# EAGLE board acdr_3.1 (EAGLE 7.7.0)
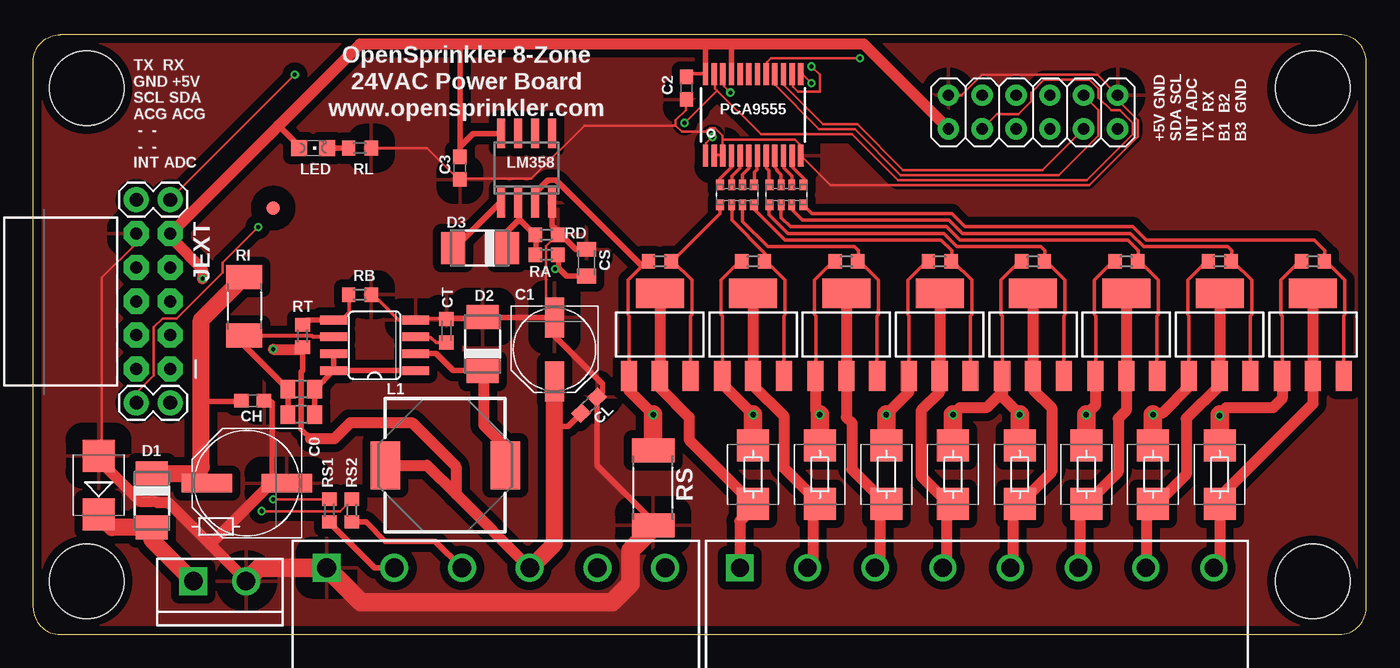
[diagram p0: board, top side]
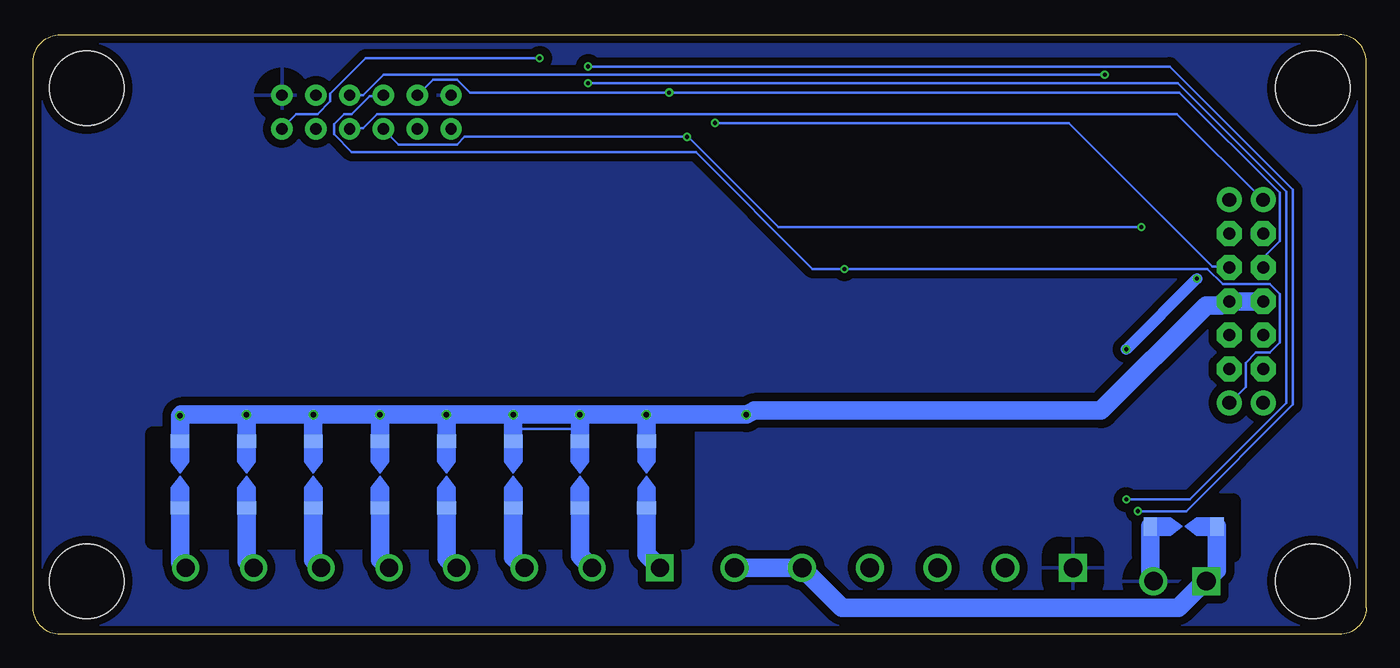
[diagram p1: board, bottom side, seen from below]

Size 100 x 45 mm. Coordinates in mm from the lower left corner, seen from the top.
Outline: 2,0 98,0 arc90 100,2 100,43 arc90 98,45 2,45 arc90 0,43 0,2 arc90 2,0
Copper layers (1*16): Top 0.035mm / dielectric 1.5mm / Bottom 0.035mm
Design rules "Fusion_eagle_rule_v1.1 *": minimum track width 6mil, minimum drill 12mil, track to track 6mil, track to pad 6mil, pad to pad 6mil, via to via 6mil, smd to smd 0mil, copper to edge 10mil, drill to drill 10mil, minimum pad ring 10mil, minimum via ring 6mil, stop-mask expansion 2mil, vias tented up to drill 100mil, thermal gap 50mil
Net classes: 0 default: width 0.203 mm, clearance 0.178 mm; 1 power: width 0.203 mm, clearance 0.178 mm; 2 relaypower: width 0.203 mm, clearance 0.178 mm; 3 signal: width 0.203 mm, clearance 0.178 mm; 4 adc: width 0.406 mm, clearance 0.178 mm
Holes 5.6 mm at 4,4 96,4 4,41 96,41
bRestrict: area 10,6 to 17,10; area 51,7 to 91,15

## Footprints (pad centres in the part's own frame; a part is rotated, then mirrored left to right if it is on the bottom)
FIDUCIAL_1MM = smd 1 x 1: 1 0,0
PANASONIC_E = smd 3.8 x 1.4: + 3,0; - -3,0
PANASONIC_D = smd 3 x 1.4: + 2.4,0; - -2.4,0
C0603 = smd 1.1 x 1: 1 -0.85,0; 2 0.85,0
C0805K = smd 1.1 x 1.4: 1 -1,0; 2 1,0
C0603K = smd 1.05 x 1.08: 1 -0.875,0; 2 0.875,0
DO-214AC = smd 1.8 x 2.4: A 2.025,0; C -2.025,0
SCREWTERMINAL-5MM-6 = drill 1.4 pad 2.032 square: 1 0,0 | drill 1.4 pad 2.032: 2 5.08,0; 3 10.16,0; 4 15.24,0; 5 20.32,0; 6 25.4,0
2X06 = drill 0.85 pad 1.6: 1 -6.35,-1.27; 2 -6.35,1.27; 3 -3.81,-1.27; 4 -3.81,1.27; 5 -1.27,-1.27; 6 -1.27,1.27; 7 1.27,-1.27; 8 1.27,1.27; 9 3.81,-1.27; 10 3.81,1.27; 11 6.35,-1.27; 12 6.35,1.27
1X02 = drill 1.016 pad 1.88: 1 0,0; 2 2.54,0
2X5-RAF = drill 0.9 pad 1.88 octagon: 1 -1.27,5.08; 2 1.27,5.08; 3 -1.27,2.54; 4 1.27,2.54; 5 -1.27,0; 6 1.27,0; 7 -1.27,-2.54; 8 1.27,-2.54; 9 -1.27,-5.08; 10 1.27,-5.08
SCREWTERMINAL-4MM-2-X = drill 1.4 pad 2.032 square: 1 0,0 | drill 1.4 pad 2.032: 2 3.96,0
SRU1038 = smd 2.2 x 3.6: 1 -4.5,0; 2 4.5,0
CHIPLED_0805 = smd 1.2 x 1.2: A 0,-1.05; C 0,1.05
SO08 = smd 0.6 x 2.2: 1 -1.905,-2.6; 2 -0.635,-2.6; 3 0.635,-2.6; 4 1.905,-2.6; 5 1.905,2.6; 6 0.635,2.6; 7 -0.635,2.6; 8 -1.905,2.6
SO08' = smd 0.66 x 2.032: 1 -1.905,-3.073; 2 -0.635,-3.073; 3 0.635,-3.073; 4 1.905,-3.073; 5 1.905,3.073; 6 0.635,3.073; 7 -0.635,3.073; 8 -1.905,3.073
TSSOP24 = smd 0.4 x 1.65: 1 -3.575,-3.05; 2 -2.925,-3.05; 3 -2.275,-3.05; 4 -1.625,-3.05; 5 -0.975,-3.05; 6 -0.325,-3.05; 7 0.325,-3.05; 8 0.975,-3.05; 9 1.625,-3.05; 10 2.275,-3.05; 11 2.925,-3.05; 12 3.575,-3.05; 13 3.575,3.05; 14 2.925,3.05; 15 2.275,3.05; 16 1.625,3.05; 17 0.975,3.05; 18 0.325,3.05; 19 -0.325,3.05; 20 -0.975,3.05; 21 -1.625,3.05; 22 -2.275,3.05; 23 -2.925,3.05; 24 -3.575,3.05
R0603 = smd 1 x 1.1: 1 -0.85,0; 2 0.85,0
R2010 = smd 1.8 x 2.7: 1 -2.2,0; 2 2.2,0
EXB38V = smd 0.6 x 0.8: 1 -1.275,-0.75; 4 1.275,-0.75; 5 1.275,0.75; 8 -1.275,0.75 | smd 0.5 x 0.8: 2 -0.4,-0.75; 3 0.4,-0.75; 6 0.4,0.75; 7 -0.4,0.75
R2512 = smd 1.8 x 3.2: 1 -2.8,0; 2 2.8,0
R0805 = smd 1.1 x 1.4: 1 -1,0; 2 1,0
SCREWTERMINAL-5MM-8 = drill 1.35 pad 2.032 square: 1 0,0 | drill 1.35 pad 2.032: 2 5.08,0; 3 10.16,0; 4 15.24,0; 5 20.32,0; 6 25.4,0; 7 30.48,0; 8 35.56,0
PCB-SGAP = smd 1 x 1.4 bottom: 1 -2.5,0; 2 2.5,0
SOT223 = smd 1.219 x 2.235: 1 -2.311,-3.099; 2 0,-3.099; 3 2.311,-3.099 | smd 3.6 x 2.2: 4 0,3.099
SMB = smd 2.4 x 2.4: A 2.2,0; C -2.2,0

## Placement (x,y rotation side)
1F  FIDUCIAL  [FIDUCIAL_1MM]  18,32 0 top
C0  100uF/50V  [PANASONIC_E]  16.02,11.35 180 top
C1  100uF/35V  [PANASONIC_D]  39.1,21.4 270 top
C2  0.1u  [C0603]  49,41 270 top
C3  0.1u  [C0603]  32,35 270 top
CH  0.1u  [C0603]  16.46,17.53 0 top
CL  0.1u  [C0603]  41.7,17.2 45 top
CS  10u  [C0805K]  41.5,27.9 90 top
CT  150pF  [C0603K]  31,22.8 90 top
D1  M7  [DO-214AC]  8.89,10.04 270 top
D2  SS14  [DO-214AC]  33.7,21.8 90 top
D3  M7  [DO-214AC]  33.5,29 180 top
JCOM  [SCREWTERMINAL-5MM-6]  22,5 0 top
JCON  [2X06]  75,39.2 0 top
JE1  [1X02]  7.73,32.62 0 top
JE2  [1X02]  7.73,17.38 0 top
JEXT  M05X2RAF  [2X5-RAF]  9,25 180 top
JPWR  [SCREWTERMINAL-4MM-2-X]  12,4 0 top
L1  220uH  [SRU1038]  30.9,12.7 180 top
LED  [CHIPLED_0805]  21,36.5 270 top
LM358  [SO08]  37,35 0 top
MC3063  MC34063  [SO08']  25.6,21.7 90 top
PCA9555  PCA9555  [TSSOP24]  54,39 0 top
RA  100  [R0603]  38.5,28.5 180 top
RB  1.6K  [R0603]  24.5,25.5 0 top
RB1  10K  [R0603]  47,28 0 top
RB2  10K  [R0603]  54,28 0 top
RB3  10K  [R0603]  61,28 0 top
RB4  10K  [R0603]  68,28 0 top
RB5  10K  [R0603]  75,28 0 top
RB6  10K  [R0603]  82,28 0 top
RB7  10K  [R0603]  89,28 0 top
RB8  10K  [R0603]  96,28 0 top
RD  100K  [R0603]  38.5,30 180 top
RI  3.3  [R2010]  15.83,24.63 270 top
RL  1K  [R0603]  24.5,36.5 0 top
RN1  390  [EXB38V]  52.8,33 0 top
RN2  390  [EXB38V]  56.5,33 0 top
RS  0.2  [R2512]  46.5,11 90 top
RS1  4K7  [R0603]  22.2,9.3 270 top
RS2  4K7  [R0603]  23.9,9.3 270 top
RSC  1  [R0805]  20.1,16.5 180 top
RSC1  1  [R0805]  20.1,18.4 180 top
RT  4.7K  [R0603]  20.2,22.4 90 top
S02  [SCREWTERMINAL-5MM-8]  53,5 0 top
SP0  PCB-SGAP  [PCB-SGAP]  13.7,8.1 0 top
SP1  PCB-SGAP  [PCB-SGAP]  54,12 270 top
SP2  PCB-SGAP  [PCB-SGAP]  59,12 270 top
SP3  PCB-SGAP  [PCB-SGAP]  64,12 270 top
SP4  PCB-SGAP  [PCB-SGAP]  69,12 270 top
SP5  PCB-SGAP  [PCB-SGAP]  74,12 270 top
SP6  PCB-SGAP  [PCB-SGAP]  79,12 270 top
SP7  PCB-SGAP  [PCB-SGAP]  84,12 270 top
SP8  PCB-SGAP  [PCB-SGAP]  89,12 270 top
T1  BT1308W  [SOT223]  47,22.5 0 top
T2  BT1308W  [SOT223]  54,22.5 0 top
T3  BT1308W  [SOT223]  61,22.5 0 top
T4  BT1308W  [SOT223]  68,22.5 0 top
T5  BT1308W  [SOT223]  75,22.5 0 top
T6  BT1308W  [SOT223]  82,22.5 0 top
T7  BT1308W  [SOT223]  89,22.5 0 top
T8  BT1308W  [SOT223]  96,22.5 0 top
TVS0  SMBJ45CA  [SMB]  4.9,11.2 90 top
TVS1  SMBJ45CA  [SMB]  54,12 270 top
TVS2  SMBJ45CA  [SMB]  59,12 270 top
TVS3  SMBJ45CA  [SMB]  64,12 270 top
TVS4  SMBJ45CA  [SMB]  69,12 270 top
TVS5  SMBJ45CA  [SMB]  74,12 270 top
TVS6  SMBJ45CA  [SMB]  79,12 270 top
TVS7  SMBJ45CA  [SMB]  84,12 270 top
TVS8  SMBJ45CA  [SMB]  89,12 270 top

## Library data of the parts
1F RB RI RSC RSC1 RT = adafruitGood
C0 C1 = resistor
C2 C3 CH CL CS CT LED MC3063 = adafruit
D1-D3 TVS0 = diode
JCOM JPWR S02 T1-T8 = SparkFun
JCON = pinhead
JE1 JE2 JEXT L1 PCA9555 TVS1-TVS8 = SparkFunNew
LM358 = linear
RA RD RL RS RS1 RS2 = adafruit2013
RB1-RB8 = rcl
RN1 RN2 = resistor-dil; OC_FARNELL: unknown; OC_NEWARK: unknown
SP0 SP1-SP8 = varistor

## Nets
ACRET: JEXT.5 JEXT.6 LM358.3 RB1.1 RB2.1 RB3.1 RB4.1 RB5.1 RB6.1 RB7.1 RB8.1 RS.2 SP1.1 SP2.1 SP3.1 SP4.1 SP5.1 SP6.1 SP7.1 SP8.1 T1.1 T2.1 T3.1 T4.1 T5.1 T6.1 T7.1 T8.1 TVS1.C TVS2.C TVS3.C TVS4.C TVS5.C TVS6.C TVS7.C TVS8.C
B1: JCON.9 PCA9555.15
B2: JCON.10 PCA9555.16
B3: JCON.11 PCA9555.17
COM [power]: D1.A JCOM.5 JCOM.6 JPWR.1 SP0.1 TVS0.C
DADC [signal]: CS.1 JCON.6 JE2.2 RA.1
DGND [power]: C0.- C1.- C2.2 C3.2 CH.2 CL.2 CS.2 CT.2 D2.A JCOM.1 JCON.2 JCON.12 JEXT.10 JPWR.2 LM358.4 MC3063.4 PCA9555.2 PCA9555.3 PCA9555.12 RB.2 RD.1 RL.2 RS.1 SP0.2 TVS0.A
DSCL [signal]: JCON.4 JEXT.8 PCA9555.22
DSDA [signal]: JCON.3 JEXT.7 PCA9555.23
DVIN [power]: C1.+ C2.1 C3.1 CL.1 JCOM.4 JCON.1 JEXT.9 L1.2 LED.A LM358.8 PCA9555.21 PCA9555.24 RT.1
INT [signal]: JCON.5 JE2.1 PCA9555.1
N$1 [power]: MC3063.1 MC3063.7 MC3063.8 RSC1.1 RSC.1
N$2: JCOM.2 RS1.2
N$3: JCOM.3 RS2.2
N$7: D3.C LM358.2 RA.2 RD.2
N$8: RB1.2 RN1.1 T1.3
N$9: RB2.2 RN1.2 T2.3
N$15: RB3.2 RN1.3 T3.3
N$16: RB4.2 RN1.4 T4.3
N$17 [power]: D2.C L1.1 MC3063.2
N$18: RB5.2 RN2.1 T5.3
N$19: RB6.2 RN2.2 T6.3
N$21: RB7.2 RN2.3 T7.3
N$22: RB8.2 RN2.4 T8.3
N$24: CT.1 MC3063.3
N$26: MC3063.5 RB.1 RT.2
N$27 [power]: MC3063.6 RI.2 RSC1.2 RSC.2
N$28: LED.C RL.1
N$43: D3.A LM358.1
N$50 [power]: S02.1 SP1.2 T1.2 T1.4 TVS1.A
N$51 [power]: S02.2 SP2.2 T2.2 T2.4 TVS2.A
N$52 [power]: S02.3 SP3.2 T3.2 T3.4 TVS3.A
N$53 [power]: S02.4 SP4.2 T4.2 T4.4 TVS4.A
N$54 [power]: S02.5 SP5.2 T5.2 T5.4 TVS5.A
N$55 [power]: S02.6 SP6.2 T6.2 T6.4 TVS6.A
N$56 [power]: S02.7 SP7.2 T7.2 T7.4 TVS7.A
N$57 [power]: S02.8 SP8.2 T8.2 T8.4 TVS8.A
P0: PCA9555.4 RN1.8
P1: PCA9555.5 RN1.7
P2: PCA9555.6 RN1.6
P3: PCA9555.7 RN1.5
P4: PCA9555.8 RN2.8
P5: PCA9555.9 RN2.7
P6: PCA9555.10 RN2.6
P7: PCA9555.11 RN2.5
RECAC [power]: C0.+ CH.1 D1.C RI.1
RFRX: JCON.8 JE1.2
RFTX: JCON.7 JE1.1
S1 [signal]: PCA9555.13 RS1.1
S2 [signal]: PCA9555.14 RS2.1

## Tracks (layer width: path | path; a pad name or v marks a point on that pad's centre or on a via)
ACRET  (via drill 0.41)
  Top 0.254: T1.1 44.7,19.5 44.7,23.9 44.6,24 44.6,26.6 45.65,27.65 46.1,28.1 46.2,28.1 46.2,28 RB1.1 | T2.1 51.7,19.5 51.7,23.9 51.6,24 51.6,26.6 53.1,28.1 53.2,28.1 53.2,28 RB2.1 | T3.1 58.7,19.5 58.7,23.9 58.6,24 58.6,26.6 60.1,28.1 60.2,28.1 60.2,28 RB3.1 | T4.1 65.7,19.5 65.7,23.9 65.6,24 65.6,26.6 67.1,28.1 67.2,28.1 67.2,28 RB4.1 | T5.1 72.7,19.5 72.7,23.9 72.6,24 72.6,26.6 74.1,28.1 74.2,28.1 74.2,28 RB5.1 | T6.1 79.7,19.5 79.7,23.9 79.6,24 79.6,26.6 81.1,28.1 81.2,28.1 81.2,28 RB6.1 | T7.1 86.7,19.5 86.7,23.9 86.6,24 86.6,26.6 88.1,28.1 88.2,28.1 88.2,28 RB7.1 | T8.1 93.7,19.5 93.7,23.9 93.6,24 93.6,26.6 95.1,28.1 95.2,28.1 95.2,28 RB8.1
  Top 0.406: 45.65,27.65 39.2,34.1 38.6,34.1 37.6,33.1 37.6,32.4 LM358.3
  Top 0.813: T2.1 51.69,18.81 v54,16.5 | T3.1 58.69,16.81 v59,16.5 | T4.1 65.69,18.19 v64,16.5 | v69,16.5 69.5,17 71.5,17 72.69,18.19 T5.1 72.69,17.81 v74,16.5 | T6.1 79.69,17.19 v79,16.5 | T8.1 93.69,17.69 93,17 89.5,17 89,16.5 | T1.1 44.69,18.31 v46.5,16.5 | T7.1 86.69,18.59 84.7,16.6 84.1,16.6 v84,16.5
  Top 1.4: TVS1.C v54,16.5 | TVS2.C v59,16.5 | TVS4.C v69,16.5 | TVS5.C v74,16.5 | TVS6.C v79,16.5 | TVS7.C v84,16.5 | TVS8.C v89,16.4 89,16.5 | TVS3.C v64,16.5 | v46.5,16.5 RS.2
  Bottom 0.203: 59,15.81 59.05,15.81 v59,16.5 | 64,15.43 59,15.43
  Bottom 1.4: v54,16.5 v59,16.5 v64,16.5 v69,16.5 | v69,16.5 v74,16.5 | v74,16.5 78.8,16.5 | 78.8,16.5 v79,16.5 v84,16.5 | v84,16.5 88.9,16.5 v89,16.4 SP8.1 | v54,16.5 SP1.1 | SP2.1 59,15.43 59,15.81 59,16.4 | SP3.1 64,15.43 64,16.4 | SP4.1 v69,16.5 | SP5.1 v74,16.5 | SP6.1 79,16.3 78.8,16.5 | SP7.1 v84,16.5 | v54,16.5 v46.5,16.5 45.9,16.8 19.9,16.8 12,24.7 10.9,24.7 JEXT.5 JEXT.6
B1
  Top 0.203: PCA9555.15 56.29,42.01 56.29,41.24 59.24,38.29 61.82,38.29 65.25,34.86 75.72,34.86 78.77,37.91 JCON.9
B2
  Top 0.203: PCA9555.16 55.63,42.01 55.63,41.24 58.96,37.91 61.63,37.91 65.06,34.48 76.96,34.48 79.92,37.43 79.92,39.34 78.87,40.39 JCON.10
B3  (via drill 0.3)
  Top 0.203: v62.01,43.24 55.34,43.24 55.05,42.96 55.05,42.1 PCA9555.17
  Bottom 0.203: v62.01,43.24 75.06,43.24 77.72,40.58 77.72,40.01 78.68,39.05 80.3,39.05 81.34,38.01 JCON.11
COM
  Top 1.27: JPWR.1 8.89,7.11 D1.A 5.88,8.02 TVS0.C
  Bottom 1.4: JCOM.6 JCOM.5 39.32,2 14.1,2 12.1,4 JPWR.1 11.2,4.8 SP0.1
DADC  (via drill 0.3)
  Top 0.203: v39.15,27.43 39.24,27.43 39.4,27.5
  Top 0.406: CS.1 40,26.9 39.4,27.5 39.4,28.5 RA.1
  Bottom 0.203: JE2.2 10.19,17.43 9.05,18.57 9.05,20.38 8.29,21.14 7.24,21.14 6.48,21.91 6.48,25.53 7.24,26.29 10.76,26.29 11.91,27.43 v39.15,27.43 41.53,27.43 50.29,36.2 76.11,36.2 77.44,37.53 77.44,38.29 76.68,39.05 76.11,39.05 74.77,40.39 73.82,40.39 JCON.6
DGND
  Top 0.203: JCON.2 68.67,40.48 69.63,40.48 71.15,42.01 79.82,42.01 81.34,40.48 JCON.12 81.44,40.39 81.44,40.01 82.87,38.58 82.87,37.34 79.25,33.72 59.82,33.72 57.63,35.91 PCA9555.12 57.53,36.01 57.53,36.77 57.15,37.15 51.72,37.15 | 48.2,38.2 48.2,38.58 48.96,39.34 48.96,40.1 C2.2 | 48.2,38.2 48.67,37.72 50.48,37.72 50.77,38.01 51.15,38.01 51.72,37.43 51.72,37.15 | 51.72,37.15 51.72,36.01 PCA9555.3 51.63,36.01 51.15,36.01 PCA9555.2 | RL.2 25.43,36.48 29.53,36.48 31.81,34.2 C3.2 32.19,34.2 37.34,34.2 41.34,38.2 48.2,38.2 | RD.1 39.24,29.91 38.48,29.15 38.48,24 C1.- | JEXT.10 7.71,30 7.71,29.34 5.14,26.77 5.14,13.72 TVS0.A
  Top 0.254: CT.2 31,23.7 29.6,23.7 29.5,23.6 28.7,23.6 MC3063.4 28.6,23.6 27.4,23.6 25.4,25.6 25.3,25.5 RB.2
  Top 0.406: C0.- 17.9,11.8 17.9,17.4 17.8,17.5 17.4,17.5 CH.2 | CT.2 31.1,23.7 32.4,23.7 32.5,23.8 33.7,23.8 D2.A 33.9,23.8 C1.- 39.1,22.4 42.7,18.8 42.7,18.2 CL.2 42.3,17.6 42.3,12.7 46.2,8.8 RS.1 | CS.2 40.7,28.9 39.8,29.8 39.6,30 | 39.6,30 RD.1 | LM358.4 38.91,30.7 39.6,30
  Top 0.813: TVS0.A 4.8,13.4 4.7,13.3 8,10 8.9,10 9.3,9.9 10.1,9.9 13.25,6.75 | 13.25,6.75 15.5,4.5 JPWR.2 | 13.25,6.75 17.9,11.4 19,11.4 C0.-
  Top 1.4: RS.1 46.5,8 44.8,6.3 44.8,3.8 43.4,2.4 24.6,2.4 JCOM.1 16.96,5 JPWR.2
  Bottom 1.4: SP0.2 16.2,4.24 JPWR.2
  pour Top (isolate 0.61): 0,45 100,45 100,0 0,0
  pour Bottom (isolate 0.61): 0,45 100,45 100,0 0,0
DSCL  (via drill 0.3)
  Top 0.203: v52.29,40.67 51.82,41.15 51.82,42.01 PCA9555.22
  Bottom 0.203: JCON.4 71.15,40.48 70.01,41.62 68.2,41.62 67.25,40.67 v52.29,40.67 14,40.67 6.48,33.15 6.48,29.53 7.71,28.29 7.71,27.62 JEXT.8
DSDA  (via drill 0.3)
  Top 0.203: 51.29,40.81 54.58,37.53 61.44,37.53 64.86,34.1 79.06,34.1 82.49,37.53 82.49,38.39 81.53,39.34 80.87,39.34 79.92,40.29 79.92,40.96 79.25,41.62 75.82,41.62 74.87,40.67 74.87,40.01 73.91,39.05 72.3,39.05 71.25,38.01 JCON.3 | 51.29,40.81 51.15,40.96 51.15,42.01 PCA9555.23 | 51.29,40.81 v48.86,38.39
  Bottom 0.203: v48.86,38.39 22.29,38.39 11.53,27.62 10.29,27.62 JEXT.7
DVIN  (via drill 0.3)
  Top 0.254: C2.1 49,42 49.1,42.1 50.4,42.1 PCA9555.24
  Top 0.406: CL.1 40.1,15.6 39.1,15.6 | LM358.8 33,37.6 32,36.6 | C3.1 32,36.6 | LED.A 19.95,36.65 18.4,38.2 | 32,36.6 32,44.3 | PCA9555.21 52.38,44.02 52.1,44.3 | PCA9555.24 50.42,44.23 50.5,44.3 | RT.1 20.2,19.8 20.1,19.7 20.1,15.4 20.8,14.7
  Top 0.813: JCON.1 68.6,38 62.3,44.3 52.1,44.3 50.5,44.3 32,44.3 24.5,44.3 18.4,38.2 10.3,30.1 JEXT.9 10.4,29.7 12.7,27.4 v12.7,26.7 | L1.2 29.54,12.7 31.7,10.54 | 20.8,14.7 22.6,14.7 23.8,15.9 28.4,15.9 31.7,12.6 31.7,10.54 | 31.7,10.54 JCOM.4 | v18,21.4 20.05,21.4 RT.1
  Top 1.27: C1.+ 39.1,15.6 39.1,6.8 37.3,5 JCOM.4
  Bottom 0.813: v12.7,26.7 v18,21.4
INT  (via drill 0.3)
  Top 0.203: v50.96,37.34 50.48,36.86 50.48,36.01 PCA9555.1 | v16.86,30.57 14.19,27.91 14.19,27.15 10.76,23.72 9.72,23.72 9.05,23.05 9.05,19.43 7.81,18.19 7.81,17.43 JE2.1
  Bottom 0.203: JCON.5 73.72,37.91 72.58,36.77 68.2,36.77 67.63,37.34 v50.96,37.34 50.86,37.34 44.1,30.57 v16.86,30.57
N$1
  Top 0.406: RSC.1 RSC1.1 21.13,18.4 MC3063.8 | MC3063.7 MC3063.8 | MC3063.8 MC3063.1
N$2
  Top 0.406: JCOM.2 25.6,5 22.2,8.4 RS1.2
N$3
  Top 0.406: RS2.2 24.95,8.45 26.4,7 30.16,7 JCOM.3
N$7
  Top 0.406: 36.4,31.1 35.5,30.2 35.5,29 D3.C | 36.4,31.1 36.4,32.4 LM358.2 | 36.4,31.1 36.5,31.1 37.6,30 RD.2 37.7,29.8 37.7,28.5 RA.2
N$8
  Top 0.254: RN1.1 51.5,32.2 51.5,31.6 47.9,28 RB1.2 48,28 49.4,26.6 49.4,24 49.3,23.9 49.3,19.5 T1.3
N$9
  Top 0.254: RN1.2 52.4,31.1 54.9,28.6 54.9,28 RB2.2 55,28 56.4,26.6 56.4,24 56.3,23.9 56.3,19.5 T2.3
N$15
  Top 0.254: RN1.3 53.2,31 55.1,29.1 61.6,29.1 61.9,28.8 61.9,28 RB3.2 62,28 63.4,26.6 63.4,24 63.3,23.9 63.3,19.5 T3.3
N$16
  Top 0.254: RN1.4 54.1,32.2 54.1,31.9 56.4,29.6 68.1,29.6 68.9,28.8 68.9,28 RB4.2 69,28 70.4,26.6 70.4,24 70.3,23.9 70.3,19.5 T4.3
N$17
  Top 0.406: MC3063.2 28.7,21.1 30.2,21.1 31.5,19.8 33.7,19.8 D2.C
  Top 0.813: L1.1 35.4,14.1 33.8,15.7 33.8,19.6 D2.C
N$18
  Top 0.254: RN2.1 55.2,32.2 55.2,31.5 56.6,30.1 68.3,30.1 69.3,29.1 75.6,29.1 75.9,28.8 75.9,28 RB5.2 76,28 77.4,26.6 77.4,24 77.3,23.9 77.3,19.5 T5.3
N$19
  Top 0.254: RN2.2 56.1,31.3 56.8,30.6 68.5,30.6 69.5,29.6 82.1,29.6 82.9,28.8 82.9,28 RB6.2 83,28 84.4,26.6 84.4,24 84.3,23.9 84.3,19.5 T6.3
N$21
  Top 0.254: RN2.3 56.9,31.9 57.7,31.1 68.7,31.1 69.7,30.1 82.3,30.1 83.3,29.1 89.6,29.1 89.9,28.8 89.9,28 RB7.2 90,28 91.4,26.6 91.4,24 91.3,23.9 91.3,19.5 T7.3
N$22
  Top 0.254: RN2.4 57.8,32.2 58.4,31.6 68.9,31.6 69.9,30.6 82.5,30.6 83.5,29.6 96.1,29.6 96.9,28.8 96.9,28 RB8.2 97,28 98.4,26.6 98.4,24 98.3,23.9 98.3,19.5 T8.3
N$24
  Top 0.254: CT.1 31,21.9 30.2,21.9 29.8,22.3 28.7,22.3 MC3063.3
N$26
  Top 0.254: MC3063.5 22.6,23.6 23.1,23.6 23.7,24.2 23.7,25.5 RB.1
  Top 0.406: MC3063.5 20.55,23.61 RT.2
N$27
  Top 0.305: MC3063.6 20.96,22.34 20.9,22.4 15.86,22.4 RI.2
  Top 0.406: RSC.2 RSC1.2 15.83,21.67 RI.2
N$28
  Top 0.406: LED.C RL.1
N$43
  Top 0.406: LM358.1 35,32.4 31.5,28.9 31.4,29 D3.A
N$50
  Top 0.813: T1.4 T1.2 47,18.5 49.2,16.3 49.2,14.6 TVS1.A SP1.2 53,8.5 S02.1
  Bottom 1.4: SP1.2 54,6 S02.1
N$51
  Top 0.813: T2.4 T2.2 54,18.7 56.3,16.4 56.3,12.5 TVS2.A SP2.2 58.5,9 58.5,5 S02.2
  Bottom 1.4: SP2.2 59,5.9 58.1,5 S02.2
N$52
  Top 0.813: T3.4 T3.2 61,16.3 61.4,15.9 61.4,12.4 TVS3.A SP3.2 63.5,9 63.5,5 S02.3
  Bottom 1.4: SP3.2 64,5.8 63.2,5 S02.3
N$53
  Top 0.813: T4.4 T4.2 68,18.2 66.6,16.8 66.6,11.9 SP4.2 | SP4.2 68.5,9 68.5,5 S02.4 | SP4.2 TVS4.A
  Bottom 1.4: SP4.2 69,5.7 68.3,5 S02.4
N$54
  Top 0.813: T5.4 T5.2 75,18.4 76.4,17 76.4,12.2 TVS5.A SP5.2 73.5,9 73.5,5 S02.5
  Bottom 1.4: SP5.2 74,5.6 73.4,5 S02.5
N$55
  Top 0.813: T6.4 T6.2 82,16.8 81.4,16.2 81.4,12.2 TVS6.A SP6.2 78.5,9 78.5,5 S02.6
  Bottom 1.4: SP6.2 79,5.6 S02.6
N$56
  Top 0.813: T7.4 T7.2 89,18.7 86.5,16.2 86.5,12 SP7.2 | SP7.2 83.5,9 83.5,5 S02.7 | SP7.2 TVS7.A
  Bottom 1.4: SP7.2 84,5.5 83.5,5 S02.7
N$57
  Top 0.813: T8.4 T8.2 96,17.3 89.1,10.4 89.1,10.2 TVS8.A 89,5 S02.8
  Bottom 1.4: SP8.2 89,5.4 88.6,5 S02.8
P0
  Top 0.254: RN1.8 51.5,33.8 51.5,34.2 52.4,35.1 52.4,35.9 PCA9555.4
P1
  Top 0.254: RN1.7 52.4,34.4 53,35 53,35.9 PCA9555.5
P2
  Top 0.254: RN1.6 53.2,34.5 53.7,35 53.7,35.9 PCA9555.6
P3
  Top 0.254: RN1.5 54.1,33.8 54.1,34.7 54.3,34.9 54.3,35.9 PCA9555.7
P4
  Top 0.254: PCA9555.8 55,35.9 55,35 55.2,34.8 55.2,33.8 RN2.8
P5
  Top 0.254: RN2.7 56.1,34.5 55.8,34.8 55.8,34.9 55.6,35.1 55.6,35.9 PCA9555.9
P6
  Top 0.254: RN2.6 56.9,34.4 56.3,35 56.3,35.9 PCA9555.10
P7
  Top 0.254: PCA9555.11 56.9,35.9 56.9,35.1 57.8,34.2 57.8,33.8 RN2.5
RECAC
  Top 0.406: 12.6,17.5 15.6,17.5 CH.1
  Top 1.27: D1.C 12.3,12.06 | 12.3,12.06 C0.+ | RI.1 12.6,23.6 12.6,17.5 12.6,12.6 12.3,12.06
RFRX  (via drill 0.3)
  Top 0.203: v19.62,42.01 10.29,32.67 JE1.2
  Bottom 0.203: v19.62,42.01 73.72,42.01 75.25,40.48 76.2,40.48 JCON.8
RFTX
  Bottom 0.203: JCON.7 76.2,38.01 75.25,38.01 74.2,39.05 14.19,39.05 7.81,32.67 JE1.1
S1  (via drill 0.3)
  Top 0.203: v18,10.12 22.12,10.12 RS1.1 | v58.38,41.38 57.75,42 57.62,42 PCA9555.13
  Bottom 0.203: v18,10.12 13.25,10.12 6,17.38 6,33.25 14.12,41.38 v58.38,41.38
S2  (via drill 0.3)
  Top 0.203: RS2.1 23,9.25 v17.12,9.25 | v58.38,42.62 59,42 59,40.75 57.38,40.75 57,41.12 57,42 PCA9555.14
  Bottom 0.203: v17.12,9.25 13.5,9.25 5.5,17.25 5.5,33.38 14.75,42.62 v58.38,42.62

## Text on the board
tNames: OpenSprinkler 8-Zone | 24VAC Power Board | www.opensprinkler.com | +5V GND / SDA SCL / INT ADC / TX RX / B1 B2 / B3 GND | TX RX / GND +5V / SCL SDA / ACG ACG / - - / - - / INT ADC